# EAGLE board caphumidsens_rev2 (EAGLE 6.3)
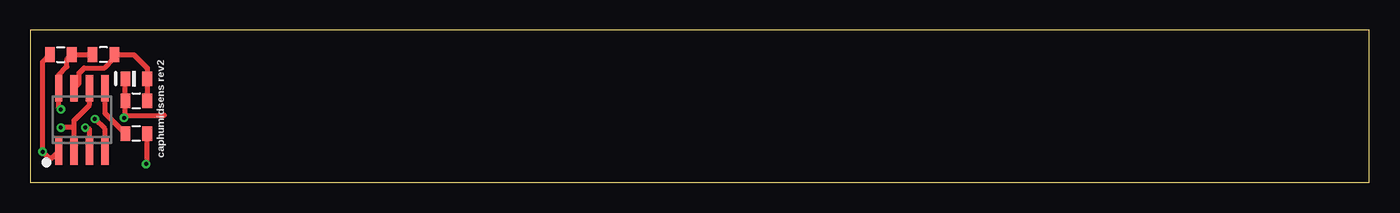
[diagram p0: board, top side]
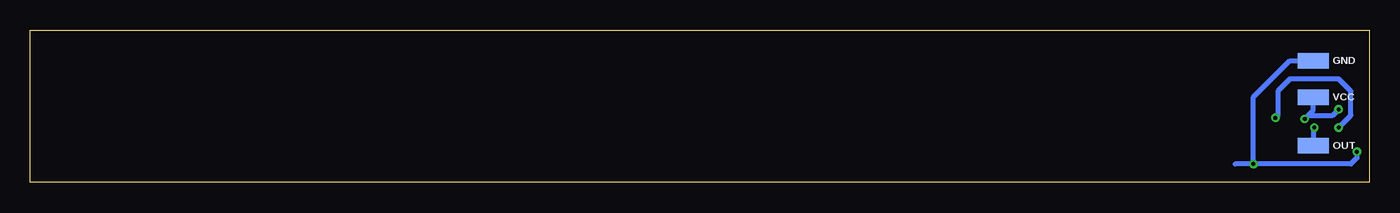
[diagram p1: board, bottom side, seen from below]

Size 110 x 12.5 mm. Coordinates in mm from the lower left corner, seen from the top.
Outline: 0,0 110,0 110,12.5 0,12.5 0,0
Copper layers (1*16): Top 0.0356mm / dielectric 1.5011mm / Bottom 0.0356mm
Design rules "oshpark_rules": minimum track width 6mil, minimum drill 13mil, track to track 6mil, track to pad 6mil, pad to pad 6mil, via to via 6mil, smd to smd 6mil, copper to edge 15mil, drill to drill 6mil, minimum pad ring 7mil, minimum via ring 7mil, stop-mask expansion 4mil, vias tented up to drill 0mil, thermal gap 10mil

## Footprints (pad centres in the part's own frame; a part is rotated, then mirrored left to right if it is on the bottom)
0805 = smd 0.8 x 1.2: 1 -0.9,0; 2 0.9,0
DIODE_0805 = smd 0.8 x 1.2: 1 -0.9,0; 2 0.9,0
SMD1,27-2,54 = smd 1.27 x 2.54: 1 0,0
SO08 = smd 0.6 x 2.2: 1 -1.905,-2.6; 2 -0.635,-2.6; 3 0.635,-2.6; 4 1.905,-2.6; 5 1.905,2.6; 6 0.635,2.6; 7 -0.635,2.6; 8 -1.905,2.6

## Placement (x,y rotation side)
C1  [0805]  8.7,4 180 top
C2  [0805]  2.5,10.5 0 top
D1  DIODE_0805  [DIODE_0805]  8.7,8.5 0 top
GND  WIREPADSMD2,54-5,08  [SMD1,27-2,54]  4.6,10 90 bottom
IC1  555  [SO08]  4.22,5.14 0 top
OUT  WIREPADSMD2,54-5,08  [SMD1,27-2,54]  4.6,3 90 bottom
R1  [0805]  6,10.5 180 top
R2  [0805]  8.7,6.7 0 top
VCC  WIREPADSMD2,54-5,08  [SMD1,27-2,54]  4.6,7 90 bottom

## Library data of the parts
C1 C2 R1 R2 = SparkFun
D1 = seb
GND OUT VCC = wirepad
IC1 = linear

## Nets
CAP+: D1.1 IC1.2 IC1.6 R2.1
GND: C1.1 C2.1 GND.1 IC1.1
N$1: D1.2 IC1.7 R1.1 R2.2
N$3: C1.2 IC1.5
N$4: IC1.3 OUT.1
VCC: C2.2 IC1.4 IC1.8 R1.2 VCC.1

## Tracks (layer width: path | path; a pad name or v marks a point on that pad's centre or on a via)
CAP+  (via drill 0.33)
  Top 0.406: IC1.6 4.86,6.36 3.59,5.09 3.59,4.52 | IC1.2 3.59,4.52 | D1.1 R2.1 7.8,5.4 v7.7,5.3 7.9,5.5 11,5.5 | 3.59,4.52 3.57,4.5 v2.5,4.5
  Bottom 0.406: v2.5,4.5 1.5,5.5 1.5,7.5 2.5,8.5 6.5,8.5 7.5,7.5 7.5,5.5 v7.7,5.3
GND  (via drill 0.33)
  Top 0.406: IC1.1 1.78,2 1.5,2 v1,2.5 1,9.9 C2.1 | v9.5,1.5 9.6,1.6 C1.1
  Bottom 0.406: v1,2.5 1,2 1.5,1.5 v9.5,1.5 | GND.1 6.5,10 9.5,7 v9.5,1.5 | v9.5,1.5 11,1.5
N$1
  Top 0.406: IC1.7 4,8.15 4,9 4.4,9.4 6.1,9.4 6.9,10.2 R1.1 8.5,10.5 9.6,9.4 D1.2 R2.2
N$3
  Top 0.406: C1.2 6.13,5.67 IC1.5
N$4  (via drill 0.33)
  Top 0.406: IC1.3 4.86,4.36 v4.5,4.5
  Bottom 0.406: v4.5,4.5 4.6,4.4 OUT.1
VCC  (via drill 0.33)
  Top 0.406: v2.5,6 2.32,6.18 IC1.8 2.32,8.82 3,9.5 3,10.1 C2.2 R1.2 | v5.3,5.2 6.13,4.37 IC1.4
  Bottom 0.406: v2.5,6 3,5.5 5,5.5 | v5.3,5.2 5,5.5 | 5,5.5 4.6,5.9 VCC.1

## Text on the board
tNames: caphumidsens rev2